# Altium PCB EMG sensors(1).PcbDoc
Units mm, origin at the board's own origin, x right, y up, seen from the top; angles counter-clockwise.
Board outline 152.4 x 101.6 mm, 20 copper layers (F.Cu, F.Mask, B.Cu, B.Mask, In1.Cu, F.SilkS, In2.Cu, B.SilkS, F.Adhes, B.Adhes, F.Paste, B.Paste, Dwgs.User, Cmts.User, Eco1.User, Eco2.User, Edge.Cuts, Margin, B.CrtYd, F.CrtYd); 30 components, 18 nets, 82 pads, 27 vias.
Unrouted connection lines stored in the file: 19.
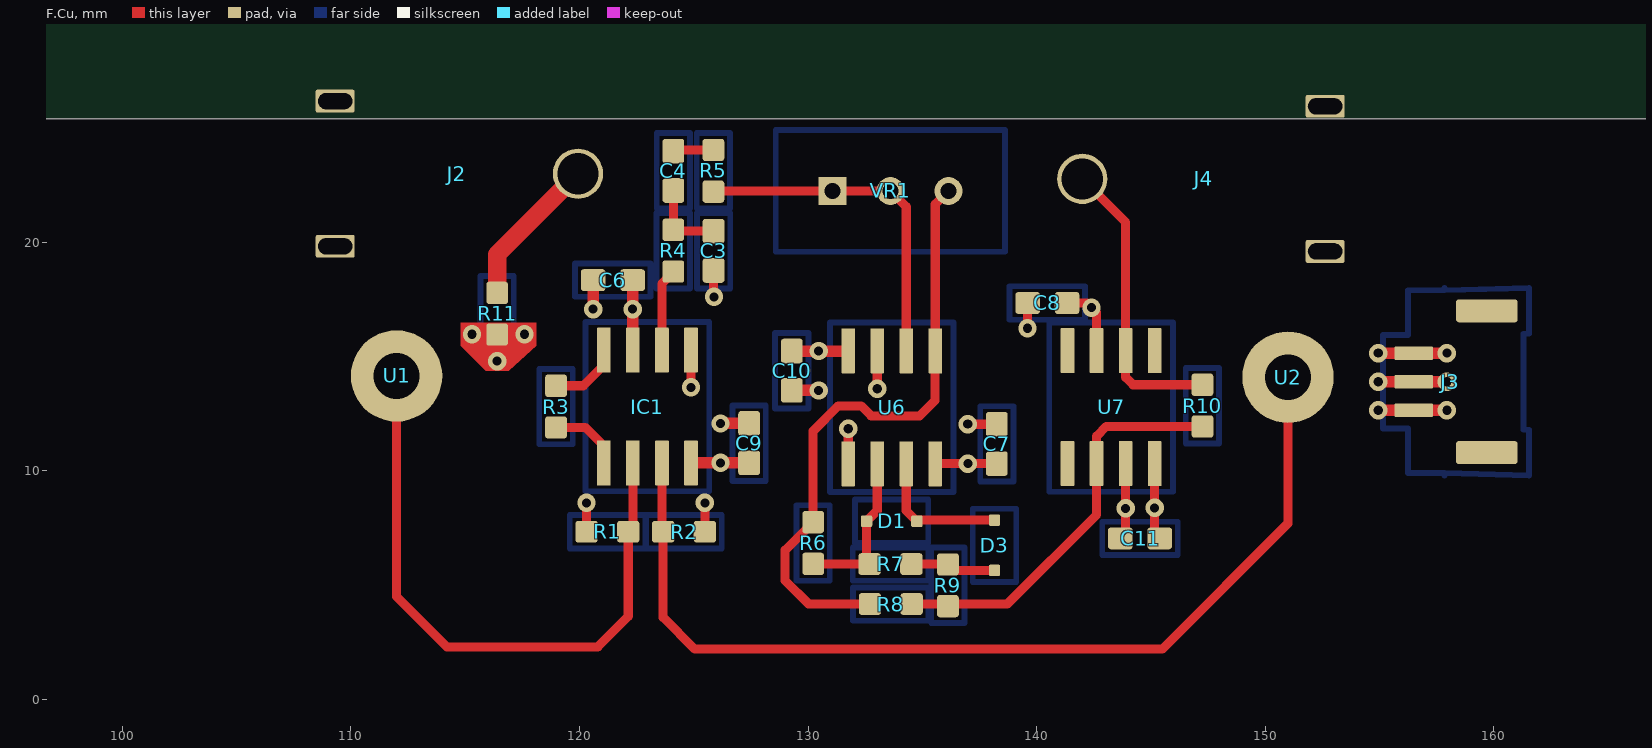
[diagram p0: F.Cu view]
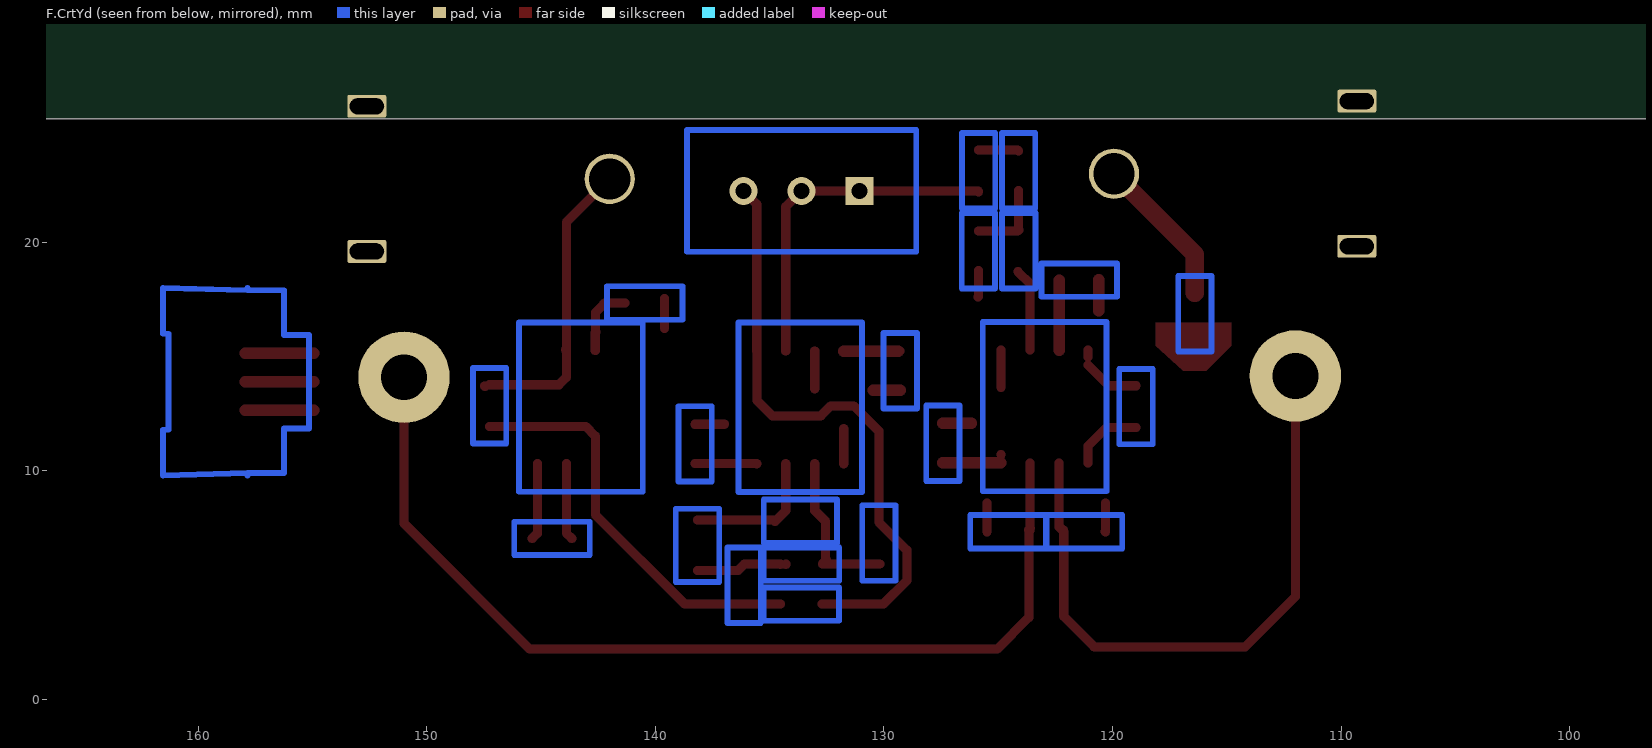
[diagram p1: F.CrtYd view, seen from below]
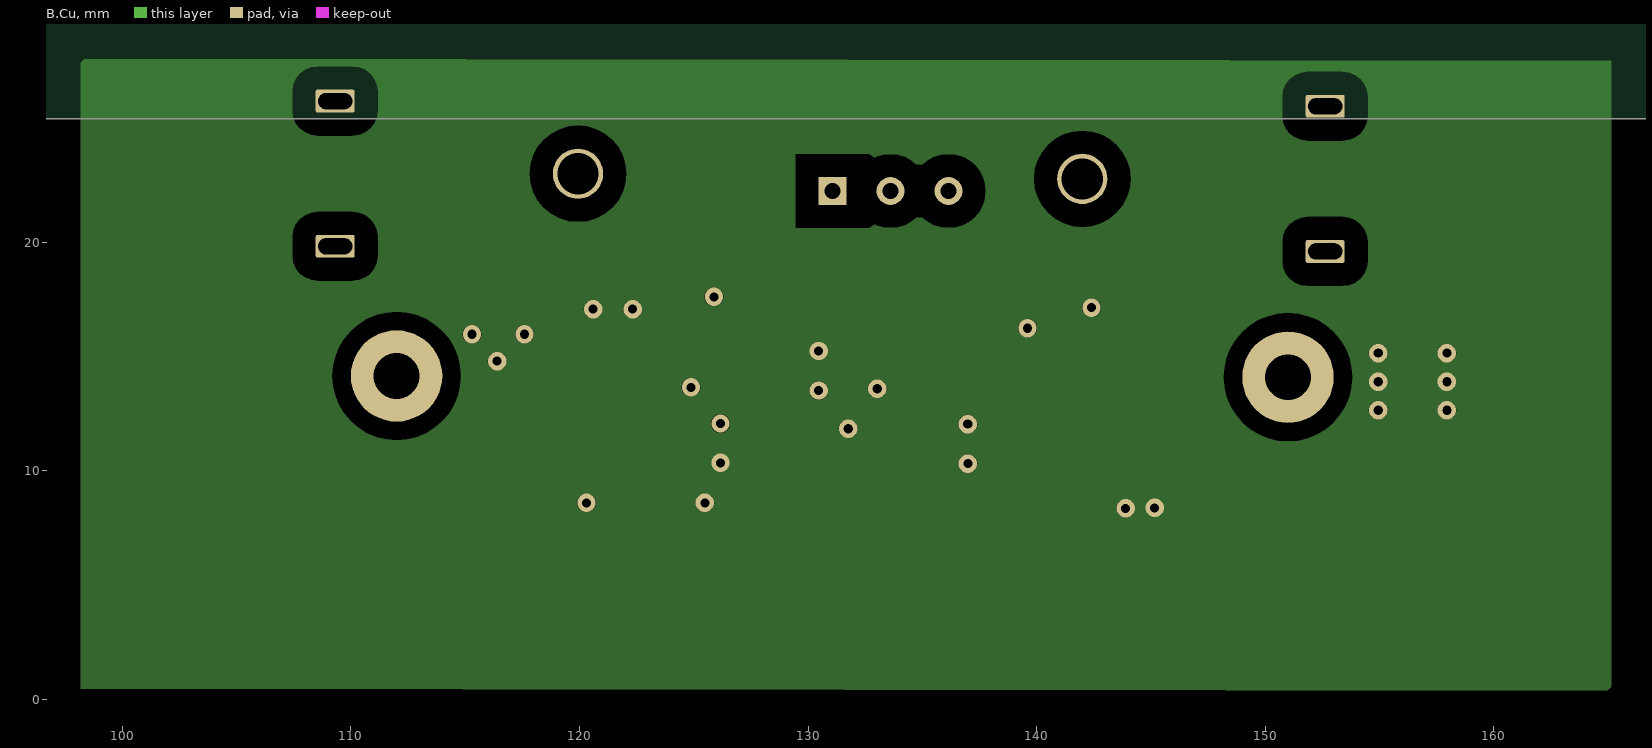
[diagram p2: B.Cu]
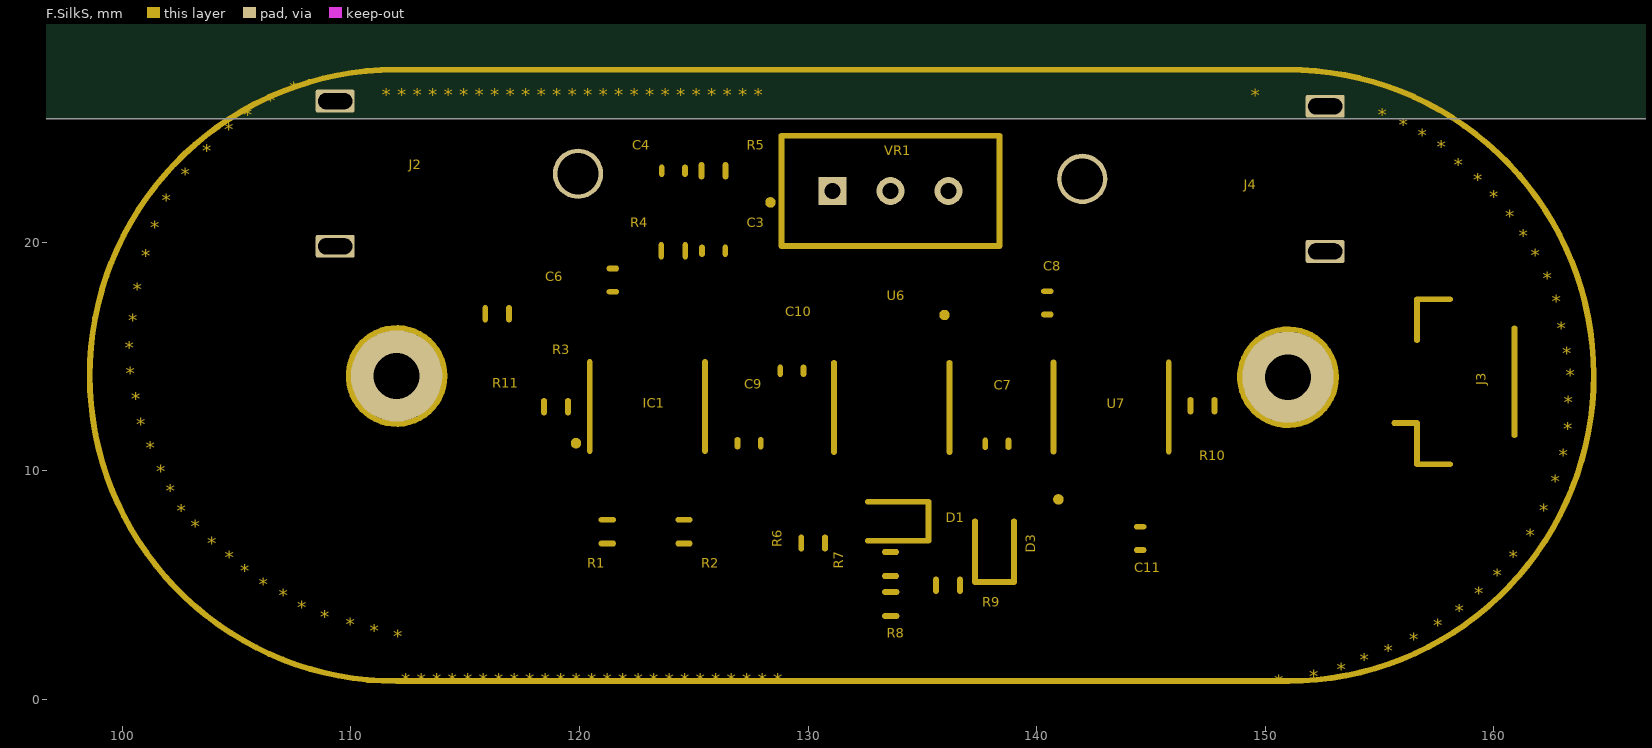
[diagram p3: F.SilkS]
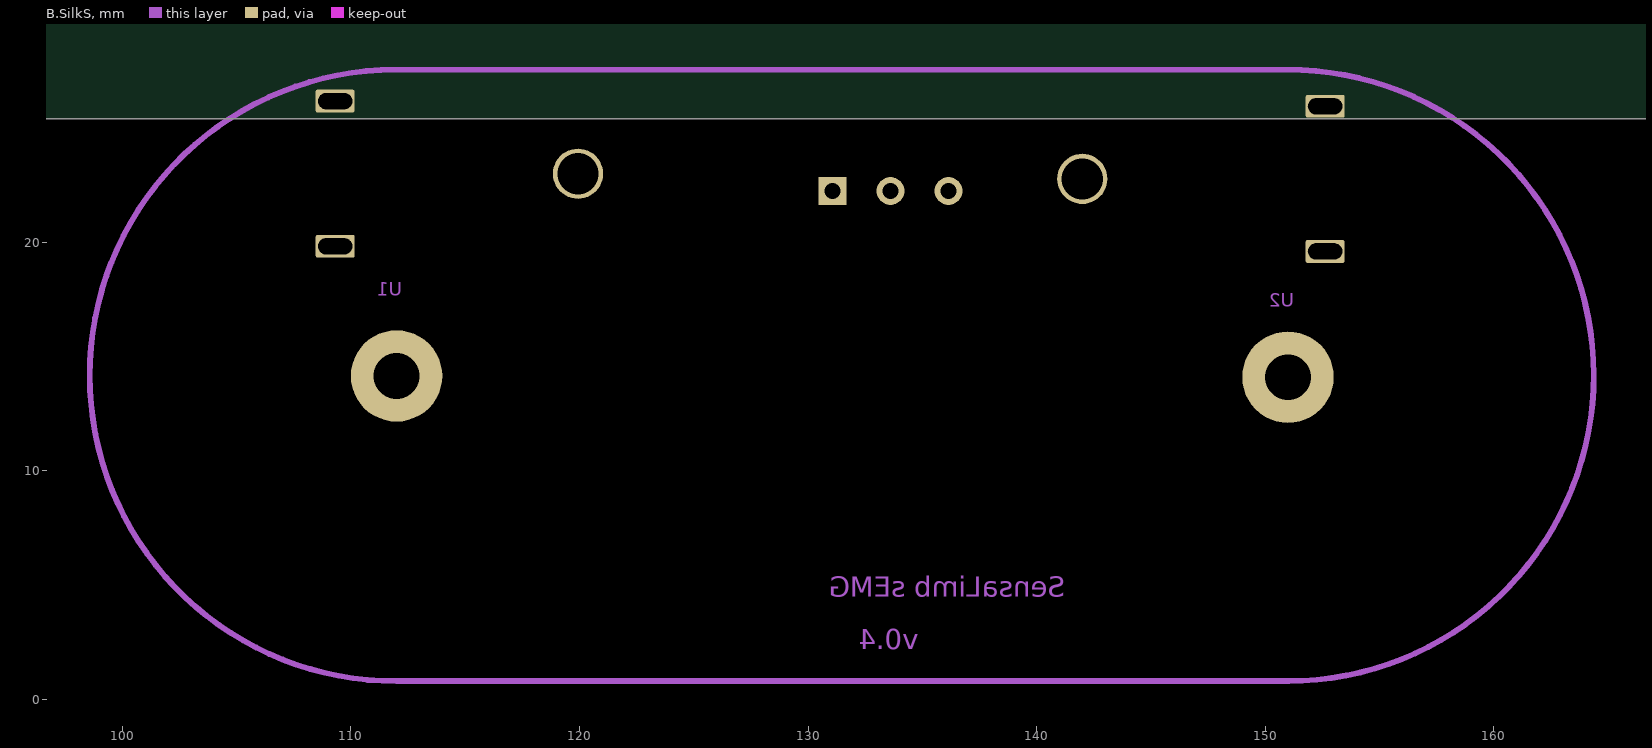
[diagram p4: B.SilkS]
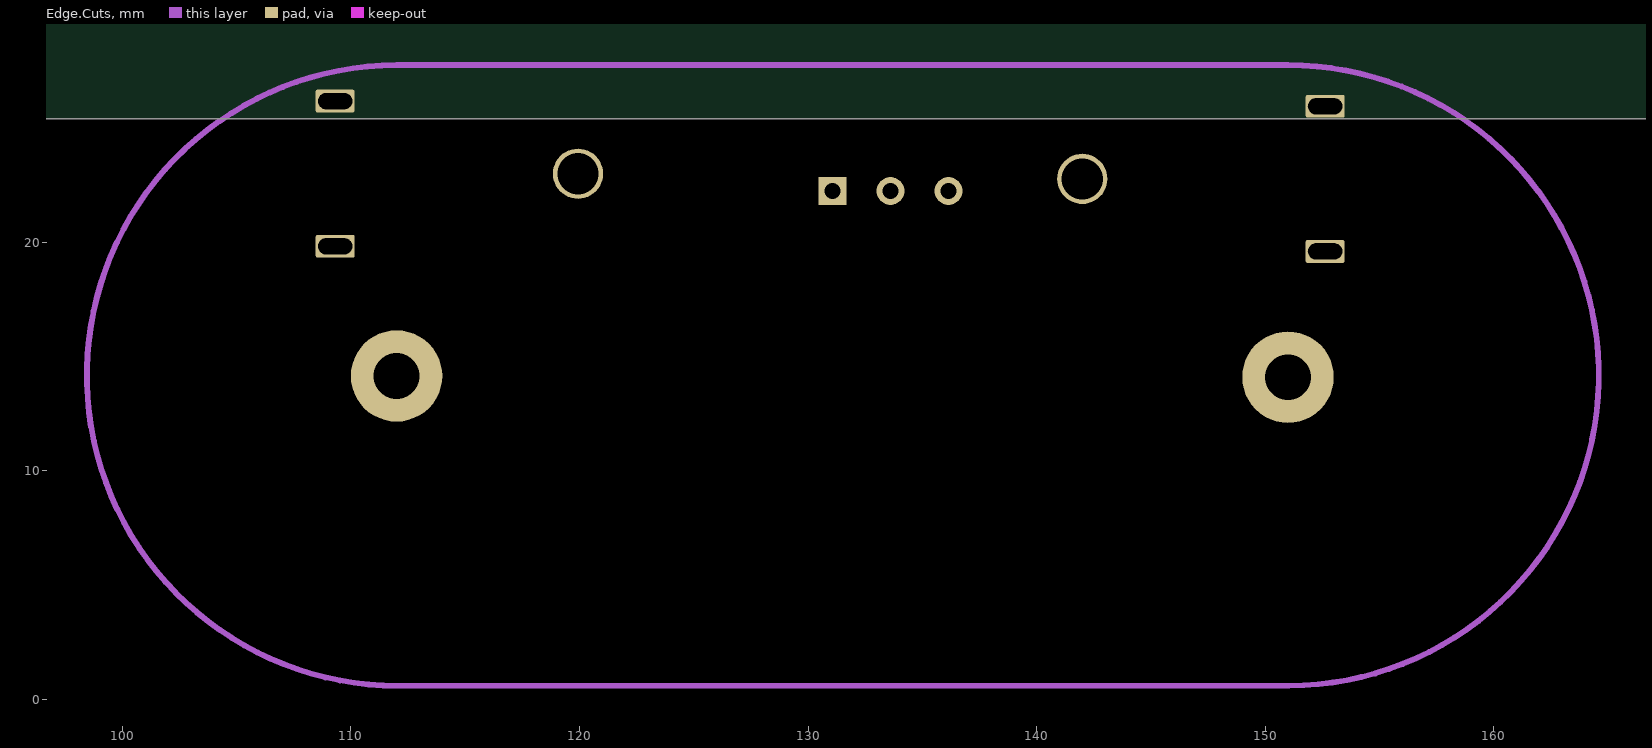
[diagram p5: Edge.Cuts]
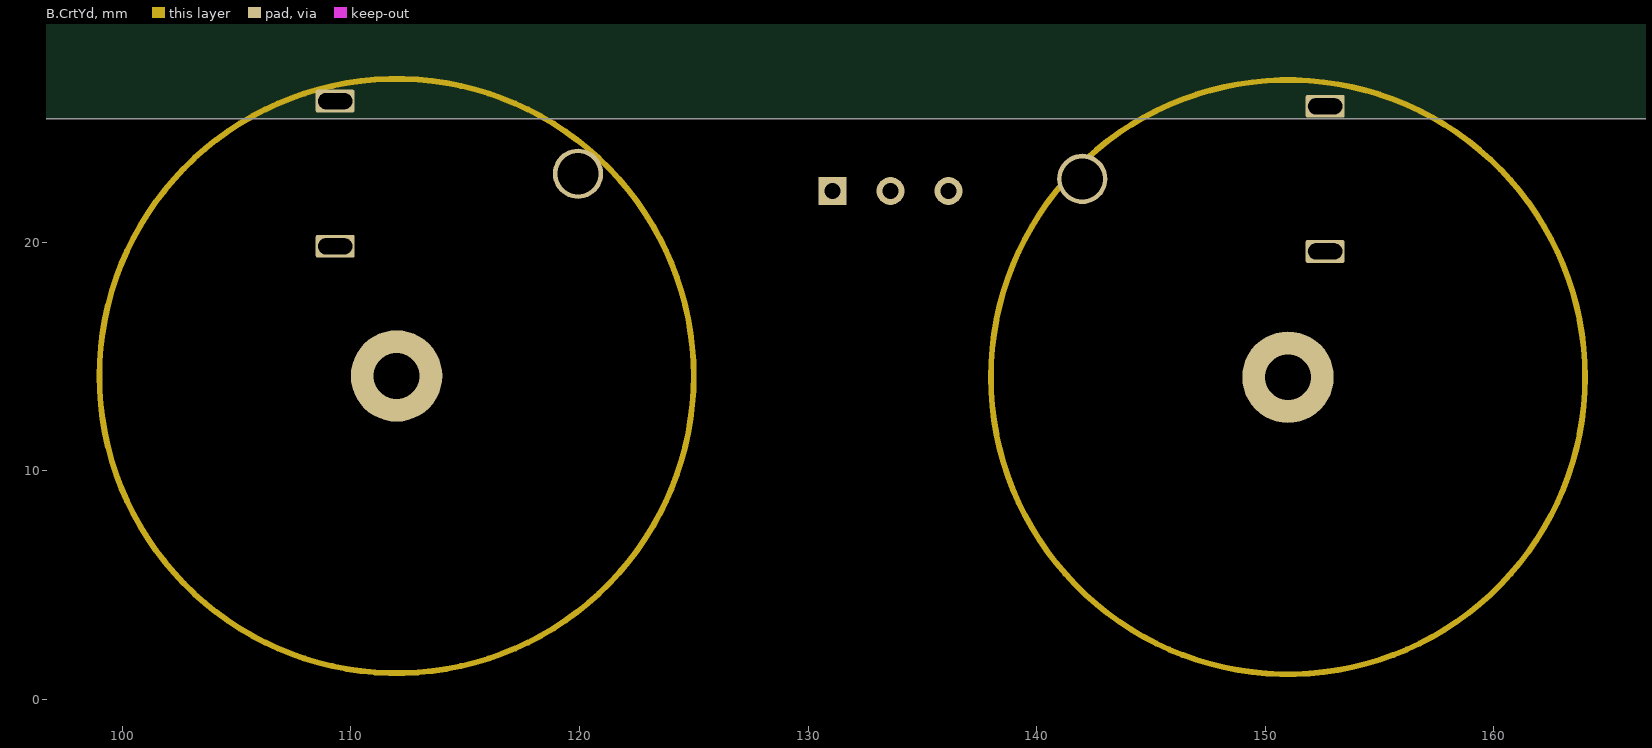
[diagram p6: B.CrtYd]

## Layer stack, top to bottom
Top Solder: solder mask 0.0102, Solder Resist, Dk 3.5
F.Cu: signal copper 0.0356
Dielectric 1: dielectric 0.32, FR-4, Dk 4.8
F.Mask: signal copper 0.0356
Dielectric2: dielectric 0.32, FR-4, Dk 4.8
B.Cu: signal copper 0.0356
Dielectric3: dielectric 0.32, FR-4, Dk 4.8
B.Mask: signal copper 0.0356
Dielectric4: dielectric 0.32, FR-4, Dk 4.8
In1.Cu: signal copper 0.0356
Dielectric5: dielectric 0.32, FR-4, Dk 4.8
F.SilkS: signal copper 0.0356
Dielectric6: dielectric 0.32, FR-4, Dk 4.8
In2.Cu: signal copper 0.0356
Dielectric7: dielectric 0.32, FR-4, Dk 4.8
B.SilkS: signal copper 0.0356
Dielectric8: dielectric 0.32, FR-4, Dk 4.8
F.Adhes: signal copper 0.0356
Dielectric9: dielectric 0.32, FR-4, Dk 4.8
B.Adhes: signal copper 0.0356
Dielectric10: dielectric 0.32, FR-4, Dk 4.8
F.Paste: signal copper 0.0356
Dielectric11: dielectric 0.32, FR-4, Dk 4.8
B.Paste: signal copper 0.0356
Dielectric12: dielectric 0.32, FR-4, Dk 4.8
Dwgs.User: signal copper 0.0356
Dielectric13: dielectric 0.32, FR-4, Dk 4.8
Cmts.User: signal copper 0.0356
Dielectric14: dielectric 0.32, FR-4, Dk 4.8
Eco1.User: signal copper 0.0356
Dielectric15: dielectric 0.32, FR-4, Dk 4.8
Eco2.User: signal copper 0.0356
Dielectric16: dielectric 0.32, FR-4, Dk 4.8
Edge.Cuts: signal copper 0.0356
Dielectric17: dielectric 0.32, FR-4, Dk 4.8
Margin: signal copper 0.0356
Dielectric18: dielectric 0.32, FR-4, Dk 4.8
B.CrtYd: signal copper 0.0356
Dielectric19: dielectric 0.32, FR-4, Dk 4.8
F.CrtYd: signal copper 0.0356
Bottom Solder: solder mask 0.0102, Solder Resist, Dk 3.5

## Board outline
25.4,25.4 177.8,25.4 177.8,127 25.4,127

## Design rules (kind name [scope] priority, off if disabled: settings)
Clearance "Clearence 1_PadClass" [InPadClass('Pad Class Clearance 1')] p1: gap=1 ignorepadtopadclearanceinfootprint=FALSE
Clearance "Clearence 0.8_PadClass" [InPadClass('Pad Class Clearance 0.8')] p2: gap=0.8 ignorepadtopadclearanceinfootprint=FALSE
MinimumSolderMaskSliver [All] p1: minsoldermaskwidth=0
PolygonConnect Polygon_In2.Cu-/+5.5V_ConnectDirect [IsNamedPolygon('In2.Cu-/+5.5V') vs IsVia] p1: connectstyle=Direct reliefconductorwidth=0.254 reliefentries=4 polygonreliefangle="90 Angle" airgapwidth=0.254
PolygonConnect Polygon_In2.Cu-/+5.5V_ConnectRelief45 [IsNamedPolygon('In2.Cu-/+5.5V') vs (IsThruPin or IsSMTPin) and (PadShape_AllLayers = 'Round')] p2: connectstyle=Relief reliefconductorwidth=0.5 reliefentries=4 polygonreliefangle="45 Angle" airgapwidth=0.5
PolygonConnect Polygon_In2.Cu-/+5.5V_ConnectRelief90 [IsNamedPolygon('In2.Cu-/+5.5V') vs (IsThruPin or IsSMTPin) and (PadShape_AllLayers <> 'Round')] p3: connectstyle=Relief reliefconductorwidth=0.5 reliefentries=4 polygonreliefangle="90 Angle" airgapwidth=0.5
PolygonConnect Polygon_In1.Cu-GND_ConnectDirect [IsNamedPolygon('In1.Cu-GND') vs IsVia] p4: connectstyle=Direct reliefconductorwidth=0.254 reliefentries=4 polygonreliefangle="90 Angle" airgapwidth=0.254
PolygonConnect Polygon_In1.Cu-GND_ConnectRelief45 [IsNamedPolygon('In1.Cu-GND') vs (IsThruPin or IsSMTPin) and (PadShape_AllLayers = 'Round')] p5: connectstyle=Relief reliefconductorwidth=0.5 reliefentries=4 polygonreliefangle="45 Angle" airgapwidth=0.5
PolygonConnect Polygon_In1.Cu-GND_ConnectRelief90 [IsNamedPolygon('In1.Cu-GND') vs (IsThruPin or IsSMTPin) and (PadShape_AllLayers <> 'Round')] p6: connectstyle=Relief reliefconductorwidth=0.5 reliefentries=4 polygonreliefangle="90 Angle" airgapwidth=0.5
PolygonConnect Polygon_B.Cu-/-5.5V_ConnectDirect [IsNamedPolygon('B.Cu-/-5.5V') vs IsVia] p7: connectstyle=Direct reliefconductorwidth=0.254 reliefentries=4 polygonreliefangle="90 Angle" airgapwidth=0.254
PolygonConnect Polygon_B.Cu-/-5.5V_ConnectRelief45 [IsNamedPolygon('B.Cu-/-5.5V') vs (IsThruPin or IsSMTPin) and (PadShape_AllLayers = 'Round')] p8: connectstyle=Relief reliefconductorwidth=0.5 reliefentries=4 polygonreliefangle="45 Angle" airgapwidth=0.5
PolygonConnect Polygon_B.Cu-/-5.5V_ConnectRelief90 [IsNamedPolygon('B.Cu-/-5.5V') vs (IsThruPin or IsSMTPin) and (PadShape_AllLayers <> 'Round')] p9: connectstyle=Relief reliefconductorwidth=0.5 reliefentries=4 polygonreliefangle="90 Angle" airgapwidth=0.5
RoutingVias [All] p1: holewidth=0.711 width=1.27 viastyle="Through Hole" minholewidth=0.711 minwidth=1.27 maxholewidth=0.711 maxwidth=1.27
SilkToSilkClearance [All] p1: silktosilkclearance=0
SilkToSolderMaskClearance [IsPad] p1: minsilkscreentomaskgap=0 clearancetoexposedcopper=TRUE
SolderMaskExpansion [All] p1: expansion=0.102 istentingtop=FALSE
Width [All] p1: maxlimit=10 minlimit=0.254 preferedwidth=0.254 midlayer1_maxwidth=0.254 midlayer3_maxwidth=0.254 midlayer9_maxwidth=0.254 midlayer11_maxwidth=0.254 midlayer13_maxwidth=0.254 midlayer15_maxwidth=0.254 midlayer17_maxwidth=0.254 midlayer19_maxwidth=0.254 midlayer21_maxwidth=0.254 midlayer23_maxwidth=0.254 midlayer27_maxwidth=0.254 minimp=50.000000 maximp=50.000000 favimp=50.000000
27 further rules are at their usual default settings.

## Classes and differential pairs
pad class "Pad Class Clearance 0.8": U1-1 U2-1
pad class "Pad Class Clearance 1": J2-1 J2-3 J4-1 J4-3 VR1-1 VR1-2 VR1-3

## Components (designator, comment, footprint, x,y, rotation, side; value= is the part's Value field where it differs from the comment)
C3 "Comment" C_0603_1608Metric_Pad1.08x0.95mm_HandSolder 125.868,19.618 r270 top value=8.2nF
C4 "Comment" C_0603_1608Metric_Pad1.08x0.95mm_HandSolder 124.109,23.117 r270 top value=1uF
C6 "Comment" C_0603_1608Metric_Pad1.08x0.95mm_HandSolder 121.463,18.334 r180 top value=1uF
C7 "Comment" C_0603_1608Metric_Pad1.08x0.95mm_HandSolder 138.262,11.168 r90 top value=1uF
C8 "Comment" C_0603_1608Metric_Pad1.08x0.95mm_HandSolder 140.47,17.333 r180 top value=1uF
C9 "Comment" C_0603_1608Metric_Pad1.08x0.95mm_HandSolder 127.423,11.202 r90 top value=1uF
C10 "Comment" C_0603_1608Metric_Pad1.08x0.95mm_HandSolder 129.293,14.37 r270 top value=1uF
C11 "Comment" C_0603_1608Metric_Pad1.08x0.95mm_HandSolder 144.526,7.033 r180 top value=1uF
D1 "Comment" D_SOD-323F 133.661,7.784 r180 top value=BAT54J
D3 "Comment" D_SOD-323F 138.159,6.733 r90 top value=BAT54J
IC1 "Comment" INA128U 122.973,12.802 r90 top value=INA128
J2 "Comment" DIN_Male_1PIN_1.5mm#1 112.687,23.289 r0 top value=Conn_01x01_Pin
J3 "Comment" JST_GH_SM03B-GHS-TB_1x03-1MP_P1.25mm_Horizontal 158.35,13.889 r90 top value=Conn_01x03_Pin
J4 "Comment" DIN_Male_1PIN_1.5mm#2 149.225,22.414 r180 top value=Conn_01x01_Pin
R1 "Comment" R_0603_1608Metric_Pad0.98x0.95mm_HandSolder 121.226,7.327 r0 top value=10M
R2 "Comment" R_0603_1608Metric_Pad0.98x0.95mm_HandSolder 124.576,7.327 r0 top value=10M
R3 "Comment" R_0603_1608Metric_Pad0.98x0.95mm_HandSolder 118.976,12.802 r270 top value=200
R4 "Comment" R_0603_1608Metric_Pad0.98x0.95mm_HandSolder 124.106,19.62 r90 top value=10k
R5 "Comment" R_0603_1608Metric_Pad0.98x0.95mm_HandSolder 125.862,23.118 r90 top value=10k
R6 "Comment" R_0603_1608Metric_Pad0.98x0.95mm_HandSolder 130.226,6.833 r270 top value=20k
R7 "Comment" R_0603_1608Metric_Pad0.98x0.95mm_HandSolder 133.609,5.912 r180 top value=20k
R8 "Comment" R_0603_1608Metric_Pad0.98x0.95mm_HandSolder 133.622,4.162 r180 top value=20k
R9 "Comment" R_0603_1608Metric_Pad0.98x0.95mm_HandSolder 136.122,4.983 r270 top value=10k
R10 "Comment" R_0603_1608Metric_Pad0.98x0.95mm_HandSolder 147.256,12.842 r90 top value=20k
R11 "Comment" R_0603_1608Metric_Pad0.98x0.95mm_HandSolder 116.4,16.864 r90 top value=1M
U1 "Comment" EMG_Snap_4mm 112,14.139 r90 top value=~
U2 "Comment" EMG_Snap_4mm 151,14.089 r90 top value=~
U6 "Comment" ОПА2188AIDR 133.665,12.768 r270 top value=OPA2188AIDR
U7 "Comment" OPA188 143.261,12.779 r90 top value=OPA188AIDR
VR1 "Comment" TRIM_3296W-1-104ALF 133.608,22.233 r0 top value=100k

## Footprints (in the part's own frame and the unit in brackets; to place one, negate y for a bottom-side part, rotate by r counter-clockwise, add the part's x,y. Pads: shape width x height; smd on the part's side, far side on the other; paste and mask are expansions set on the pad)
C_0603_1608Metric_Pad1.08x0.95mm_HandSolder [mm]
  rrect25% 1.075x0.95 smd paste-1.075 mask-1.075: 1(-0.863,0) 2(0.863,0)
  F.SilkS lines w0.254: 0.146,-0.51 -0.146,-0.51 ; 0.146,0.51 -0.146,0.51
  F.CrtYd lines w0.254: 1.65,-0.73 1.65,0.73 -1.65,0.73 -1.65,-0.73 1.65,-0.73
D_SOD-323F [mm]
  rrect25% 0.5x0.5 smd paste-0.5 mask-0.5: 1(-1.1,0) 2(1.1,0)
  F.SilkS lines w0.254: 1.05,0.85 -1.61,0.85 -1.61,-0.85 1.05,-0.85
  F.CrtYd lines w0.254: 1.6,0.95 1.6,-0.95 -1.6,-0.95 -1.6,0.95 1.6,0.95
DIN_Male_1PIN_1.5mm#1 [mm]
  round 2.2 hole 1.8 paste-2539.97 mask-2.2: 1(7.25,-0.3)
  rrect15% 1.7x1 hole 0.7 slot 1.5 at 0 deg paste-2539.97 mask-1.7: 3(-3.375,-3.475) 3(-3.375,2.875)
DIN_Male_1PIN_1.5mm#2 [mm]
  round 2.2 hole 1.8 paste-2539.97 mask-2.2: 1(7.225,-0.35)
  rrect15% 1.7x1 hole 0.7 slot 1.5 at 0 deg paste-2539.97 mask-1.7: 3(-3.4,2.825) 3(-3.4,-3.525)
EMG_Snap_4mm [mm]
  round 4 hole 2 paste-2539.97 mask-4: 1(0,0)
  B.CrtYd circle w0.254: c0,0 r13
INA128U [mm]
  rrect12% 1.97x0.6 smd paste-1.97 mask-1.97: 1(-2.47,1.905) 2(-2.47,0.635) 3(-2.47,-0.635) 4(-2.47,-1.905) 5(2.47,-1.905) 6(2.47,-0.635) 7(2.47,0.635) 8(2.47,1.905)
  F.SilkS circle w0.254: c-1.6,3.125 r0.1
  F.SilkS lines w0.254: -1.95,2.525 1.95,2.525 ; -1.95,-2.525 1.95,-2.525
  F.CrtYd lines w0.254: -3.705,2.702 3.705,2.702 3.705,-2.702 -3.705,-2.702 -3.705,2.702
JST_GH_SM03B-GHS-TB_1x03-1MP_P1.25mm_Horizontal [mm]
  rrect25% 0.6x1.7 smd paste-1.7 mask-1.7: 1(-1.25,1.85) 2(0,1.85) 3(1.25,1.85)
  rrect25% 1x2.7 smd paste-2.7 mask-2.7: MP(-3.1,-1.35) MP(3.1,-1.35)
  F.SilkS lines w0.254: -1.81,2.7 -1.81,1.71 -3.61,1.71 -3.61,0.26 ; 1.81,1.71 3.61,1.71 3.61,0.26 ; -2.34,-2.56 2.34,-2.56
  F.CrtYd lines w0.254: -4.1,0.5 -4,0.5 ; 4.1,0.5 4,0.5 ; -4,0.5 -4.1,-3.2 -2.1,-3.2 -2.1,-2.95 2.1,-2.95 2.1,-3.2 4.1,-3.2 4,0.5 ; -4,0.5 -4,2.1 -2.05,2.1 -2.05,3.2 2.05,3.2 2.05,2.1 4,2.1 4,0.5
OPA188 [mm]
  rrect12% 1.97x0.6 smd paste-1.97 mask-1.97: 1(-2.47,1.905) 2(-2.47,0.635) 3(-2.47,-0.635) 4(-2.47,-1.905) 5(2.47,-1.905) 6(2.47,-0.635) 7(2.47,0.635) 8(2.47,1.905)
  F.SilkS circle w0.254: c-4.04,2.305 r0.1
  F.SilkS lines w0.254: -1.95,2.525 1.95,2.525 ; -1.95,-2.525 1.95,-2.525
  F.CrtYd lines w0.254: -3.705,2.702 3.705,2.702 3.705,-2.702 -3.705,-2.702 -3.705,2.702
R_0603_1608Metric_Pad0.98x0.95mm_HandSolder [mm]
  rrect25% 0.975x0.95 smd paste-0.975 mask-0.975: 1(-0.913,0) 2(0.913,0)
  F.SilkS lines w0.254: -0.255,-0.523 0.255,-0.523 ; -0.255,0.523 0.255,0.523
  F.CrtYd lines w0.254: -1.65,-0.73 1.65,-0.73 1.65,0.73 -1.65,0.73 -1.65,-0.73
TRIM_3296W-1-104ALF [mm]
  rect 1.218x1.218 hole 0.71 paste-2539.97 mask-1.218: 1(-2.54,0)
  round 1.218 hole 0.71 paste-2539.97 mask-1.218: 2(0,0) 3(2.54,0)
  F.SilkS circle w0.254: c-5.25,-0.5 r0.1
  F.SilkS lines w0.254: -4.765,-2.41 4.765,-2.41 4.765,2.42 -4.765,2.42 -4.765,-2.41
  F.CrtYd lines w0.254: -5.015,-2.66 5.015,-2.66 5.015,2.67 -5.015,2.67 -5.015,-2.66
ОПА2188AIDR [mm]
  rrect12% 1.97x0.6 smd paste-1.97 mask-1.97: 1(-2.47,1.905) 2(-2.47,0.635) 3(-2.47,-0.635) 4(-2.47,-1.905) 5(2.47,-1.905) 6(2.47,-0.635) 7(2.47,0.635) 8(2.47,1.905)
  F.SilkS circle w0.254: c-4.04,2.305 r0.1
  F.SilkS lines w0.254: 1.95,-2.525 -1.95,-2.525 ; 1.95,2.525 -1.95,2.525
  F.CrtYd lines w0.254: 3.705,-2.702 3.705,2.702 -3.705,2.702 -3.705,-2.702 3.705,-2.702

## Part data
C3 C4 C6 C7 C8 C9 C10 C11: library part C_0603_1608Metric_Pad1.08x0.95mm_HandSolder, "Capacitor SMD 0603 (1608 Metric), square (rectangular) end terminal, IPC-7351 nominal with elongated pad for handsoldering. (Body size source: IPC-SM-782 page 76, https://www.pcb-3d.com/wordpress/wp-content/uploads/ipc-sm-782a_amendment_1_and_2.pdf), generated with kicad-footprint-generator", Datasheet=~, Description="Unpolarized capacitor", ki_fp_filters=C_*
  C3: Website=https://eu.mouser.com/ProductDetail/KEMET/C0603X822F5JACTU?qs=rKqJIm0tnYHyDiSLXoAHvg%3D%3D
  C4 C6 C7 C8 C9 C10 C11: Website=https://www.digikey.in/en/products/detail/kyocera-avx/KGM15BR71H104JT/1600043
D1 D3: library part D_SOD-323F, "SOD-323F http://www.nxp.com/documents/outline_drawing/SOD323F.pdf", Datasheet=https://assets.nexperia.com/documents/data-sheet/BAT54J.pdf, Description="30V 200mA Schottky diode, SOD-323F", ki_fp_filters=D*SOD?323F*
IC1: library part INA128U, Package="DIP-8 Rochester Electronics, LLC", MF="Texas Instruments", Description_1="\n                        \n                            Instrumentation Amplifier 1 Circuit - 8-PDIP\n                        \n", MPN=INA128U, Price=None, OC_FARNELL=1212413, SnapEDA_Link=https://www.snapeda.com/parts/INA128/Texas+Instruments/view-part/?ref=snap, MP=INA128, OC_NEWARK=35C1729, Availability="Not in stock", Check_prices=https://www.snapeda.com/parts/INA128/Texas+Instruments/view-part/?ref=eda
J2 J4: library part DIN_Male_1PIN_1.5mm, Datasheet=~, Description="Generic connector, single row, 01x01, script generated", ki_fp_filters=Connector*:*_1x??_*
J3: library part JST_GH_SM03B-GHS-TB_1x03-1MP_P1.25mm_Horizontal, "JST GH series connector, SM03B-GHS-TB (http://www.jst-mfg.com/product/pdf/eng/eGH.pdf), generated with kicad-footprint-generator", Datasheet=~, Description="Generic connector, single row, 01x03, script generated", ki_fp_filters=Connector*:*_1x??_*
R1 R2 R3 R4 R5 R6 R7 R8 R9 R10 R11: library part R_0603_1608Metric_Pad0.98x0.95mm_HandSolder, "Resistor SMD 0603 (1608 Metric), square (rectangular) end terminal, IPC-7351 nominal with elongated pad for handsoldering. (Body size source: IPC-SM-782 page 72, https://www.pcb-3d.com/wordpress/wp-content/uploads/ipc-sm-782a_amendment_1_and_2.pdf), generated with kicad-footprint-generator", Datasheet=~, Description=Resistor, ki_fp_filters=R_*
  R1 R2 R3: Website=https://eu.mouser.com/ProductDetail/TE-Connectivity-Holsworthy/RT73F1J200RBTD?qs=sGAEpiMZZMvdGkrng054txLI%2FDB4oIKDBdRkx0ZmGeiYIoSkg5JMIw%3D%3D
U1 U2: library part EMG_Snap_4mm
U6: library part ОПА2188AIDR, Package="SOIC-8 Texas Instruments", MF="Texas Instruments", Description_1="\n                        \n                            0.03µV/°C, 6µV Vos, Low Noise, Rail-to-Rail Output, 36V Zero-Drift Operational Amplifier\n                        \n", Price=None, SnapEDA_Link=https://www.snapeda.com/parts/OPA2188AIDR/Texas+Instruments/view-part/?ref=snap, MP=OPA2188AIDR, Availability="In Stock", Check_prices=https://www.snapeda.com/parts/OPA2188AIDR/Texas+Instruments/view-part/?ref=eda
U7: library part OPA188, Package="SOIC-8 Texas Instruments", MF="Texas Instruments", Description_1="\n                        \n                            Precision, Low-Noise, Rail-to-Rail Output, 36V Zero-Drift Operational Amplifier\n                        \n", Price=None, SnapEDA_Link=https://www.snapeda.com/parts/OPA188AIDR/Texas+Instruments/view-part/?ref=snap, MP=OPA188AIDR, Availability="In Stock", Check_prices=https://www.snapeda.com/parts/OPA188AIDR/Texas+Instruments/view-part/?ref=eda
VR1: library part TRIM_3296W-1-104ALF, Package="NON STANDARD-3 Bourns", MANUFACTURER=Bourns, MF=Bourns, Description_1="\n                        \n                            TRIMMER - 3/8in SQ MT CERMET | Bourns 3296W-1-104ALF\n                        \n", Price=None, Check_prices=https://www.snapeda.com/parts/3296W-1-104ALF/Bourns/view-part/?ref=eda, STANDARD="Manufacturer Recommendation", PARTREV=05/16, SnapEDA_Link=https://www.snapeda.com/parts/3296W-1-104ALF/Bourns/view-part/?ref=snap, MP=3296W-1-104ALF, Availability="In Stock"

## Via types
v1: diameter 0.8, hole 0.4, F.Cu to B.Cu, tented both sides, 27 vias

## Nets (pads, with @x,y where several pads share a name; then routed paths per layer and width w, separated by ;. In a path a pad name is that pad's centre, name@x,y a point inside that pad or via, vN(x,y) a via of type N, cw(c..) or ccw(c..) an arc to the next point about the centre after c; other vN are vias at no path point)
+5.5V: C6.1 C7.1 C8.1 IC1.7 J3.1 U6.8 U7.7 | length 12.7
  F.Cu w0.4: U6.8 135.577,10.305 C7.1 ; C8.1 142.205,17.333 v1(142.408,17.13) 142.626,16.912 U7.7 142.636,15.259 142.636,16.03 U7.7@142.608,16.058
  F.Cu w0.5: C6.1 122.327,18.332 IC1.7@122.327,15.265 ; v1(154.95,12.639) v1(157.95,12.639)
  other v1: 136.992,10.304 122.327,17.064
-5.5V: C9.1 C10.1 C11.1 IC1.4 J3.2 U6.4 U7.4 | length 11.4
  F.Cu w0.4: IC1.4@124.878,10.693 IC1.4@124.886,10.701 ; C10.1 129.37,15.233 C10.1@129.372,15.231 ; U6.4@131.753,15.231 U6.4 ; U7.4 v1(145.166,8.369) 145.166,7.255 C11.1
  F.Cu w0.5: IC1.4@124.886,10.339 v1(126.173,10.339) C9.1 ; C10.1@129.372,15.231 v1(130.465,15.231) U6.4@131.753,15.231 ; v1(154.95,13.889) v1(157.95,13.889)
AEMG: J4.1 R10.2 U7.6 | length 13
  F.Cu w0.4: J4.1 143.896,20.868 U7.6 ; U7.6@143.933,15.286 U7.6 ; R10.2 144.226,13.754 143.896,14.085 U7.6 ; R10.2@147.461,13.687 R10.2@147.48,13.706
GND: C3.2 C6.2 C7.2 C8.2 C9.2 C10.2 C11.2 IC1.5 J3.3 R1.1 R2.2 R11.1 U6.3 U6.5 U7.3 | length 21.3
  F.Cu w0.4: v1(120.313,8.589) R1.1 R1.1@120.326,7.339 ; v1@124.878,13.644 IC1.5 ; R2.2 v1(125.488,8.589) ; C3.2 125.868,17.618 v1(125.884,17.603) ; v1@130.461,13.508 v1(130.465,13.504) ; U6.5 v1(131.76,11.833) ; v1(133.03,13.581) U6.3 ; v1(136.987,12.032) 136.988,12.03 C7.2 ; v1(139.608,16.23) C8.2@139.608,17.53 ; C11.2 143.896,7.265 143.896,7.533 v1(143.896,8.349) U7.3
  F.Cu w0.5: v1@120.6,16.989 C6.2@120.6,18.345 ; v1(126.173,12.064) C9.2 ; C10.2 v1@130.461,13.508 ; v1(154.95,15.139) v1(157.95,15.139)
  other v1: 124.878,13.643 116.4,14.789 115.3,15.964 117.6,15.964 120.6,17.064
INVERTED: R6.1 R8.2 U6.1 VR1.3 | length 26.8
  F.Cu w0.4: R8.2 130.027,4.162 129,5.189 129,6.52 R6.1 130.226,11.733 131.326,12.833 132.326,12.833 132.766,12.392 134.885,12.392 135.563,13.07 U6.1@135.563,15.231 ; U6.1 135.57,21.655 VR1.3
Net-(C3-Pad1): C3.1 C4.2 R4.2 | length 3.5
  F.Cu w0.4: R4.2 124.158,20.481 C3.1 ; C4.2 124.109,20.563 R4.2@124.141,20.531
Net-(C4-Pad1): C4.1 R5.2 | length 1.8
  F.Cu w0.4: C4.1 124.16,24.031 R5.2
Net-(D1-A): D1.2 R6.2 R7.2 U6.6 | length 7.5
  F.Cu w0.4: R6.2@130.188,5.912 130.196,5.92 132.689,5.92 R7.2 ; R7.2@132.459,5.912 R7.2@132.524,5.977 ; R7.2@132.524,6.085 R7.2 ; U6.6 133.03,8.253 D1.2 132.561,6.048 R7.2
Net-(D1-K): D1.1 D3.2 U6.7 | length 6.1
  F.Cu w0.4: U6.7 134.3,8.253 134.296,8.249 D1.1 134.81,7.833 D3.2
Net-(D3-K): D3.1 R7.1 R9.1 | length 3.8
  F.Cu w0.4: R7.1@134.284,5.912 R7.1@134.301,5.896 ; R7.1@134.538,5.896 R7.1 136.106,5.912 R9.1 136.385,5.633 D3.1
Net-(IC1-Pad1): IC1.1 R3.2 | length 3.2
  F.Cu w0.4: R3.2 120.258,11.889 121.068,11.079 IC1.1
Net-(IC1-Pad6): IC1.6 R4.1 | length 3.7
  F.Cu w0.4: IC1.6 123.608,18.173 R4.1@124.141,18.706
Net-(IC1-Pad8): IC1.8 R3.1 | length 2.8
  F.Cu w0.4: R3.1 120.169,13.714 IC1.8@121.068,14.614 ; IC1.8@121.068,14.975 IC1.8
Net-(J2-Pin_1): J2.1 R11.2 | length 6.7
  F.Cu w0.8: R11.2 116.4,19.452 J2.1
Net-(U6--INA): R5.1 U6.2 VR1.1 VR1.2 | length 15.2
  F.Cu w0.4: R5.1@125.864,22.203 R5.1 125.889,22.233 VR1.1 VR1.2 134.3,21.54 U6.2 ; VR1.1@131.026,21.933 VR1.1@131.068,21.891 ; VR1.2@133.564,21.934 VR1.2@133.608,21.891
Net-(U7--IN): R8.1 R9.2 R10.1 U7.2 | length 18
  F.Cu w0.4: R8.1 138.717,4.162 142.626,8.071 U7.2 142.626,11.504 143.055,11.933 147.253,11.933 R10.1
Vin1: IC1.2 R1.2 U1.1 | length 26.3
  F.Cu w0.4: U1.1@112,12.189 112,4.489 114.2,2.289 120.8,2.289 122.138,3.627 R1.2 122.338,7.527 IC1.2 ; R1.2@122.151,7.395 R1.2@122.326,7.57
Vin2: IC1.3 R2.1 U2.1 | length 41.5
  F.Cu w0.4: R2.1@123.596,7.475 R2.1@123.676,7.395 ; IC1.3 123.608,7.382 R2.1 123.663,3.576 125.05,2.189 145.5,2.189 151,7.689 U2.1@151,12.139
pads on no net: J2.3 J3.MP J4.3 U7.1 U7.5 U7.8
copper on no net: | length 598.8
  F.SilkS w0.254: 151,0.789 ccw(c151,14.164) 150.95,27.539 111.95,27.539 ccw(c111.95,14.164) 112,0.789 151.05,0.789 ; 114.1,14.139 ccw(c112,14.139) 114.1,14.139 ; 153.1,14.089 ccw(c151,14.089) 153.1,14.089
  B.SilkS w0.254: 111.95,27.539 ccw(c111.95,14.164) 112,0.789 ; 111.95,27.539 ccw(c111.95,14.164) 112,0.789 ; 111.95,27.539 150.95,27.539 cw(c151,14.164) 151,0.789 151.05,0.789 112,0.789
  Edge.Cuts w0.254: 112,27.739 ccw(c112.025,14.164) 112.05,0.589 ; 112,27.739 ccw(c112.025,14.164) 112.05,0.589 ; 112,27.739 151,27.739 cw(c151.025,14.164) 151.05,0.589 112.05,0.589

## Polygon pours and split planes (outlines as drawn)
-5.5V on B.Cu "B.Cu-/-5.5V" (solid, remove dead copper, pour order 0): 98.175,0.451 165.15,0.365 165.15,27.941 98.175,28.026
GND on In1.Cu "In1.Cu-GND" (solid, remove dead copper, pour order 1): 97.8,0.207 165.1,0.12 165.1,28.073 97.8,28.159
+5.5V on In2.Cu "In2.Cu-/+5.5V" (solid, remove dead copper, pour order 2): 97.8,0.086 165.025,0 165.025,28.076 97.8,28.162

## Other copper
F.Cu:
  region: 118.1,15.464 116.9,14.364 115.9,14.364 114.8,15.464 114.8,16.464 118.1,16.464
F.SilkS:
  text "*" at 107.3,26.222 h1
  text "* * * * * * * * * * * * * * * * * * * * * * * * *" at 111.35,25.947 h1
  text "*" at 149.375,25.922 h1
  text "*" at 106.3,25.697 h1
  text "*" at 105.3,25.072 h1
  text "*" at 154.925,25.072 h1
  text "*" at 155.85,24.622 h1
  text "*" at 104.45,24.422 h1
  text "*" at 156.675,24.172 h1
  text "*" at 157.5,23.672 h1
  text "*" at 103.5,23.497 h1
  text "*" at 158.25,22.872 h1
  text "*" at 102.55,22.472 h1
  text "*" at 159.1,22.222 h1
  text "*" at 159.8,21.472 h1
  text "*" at 101.725,21.322 h1
  text "*" at 160.5,20.622 h1
  text "*" at 101.225,20.147 h1
  text "*" at 161.1,19.772 h1
  text "*" at 161.625,18.922 h1
  text "*" at 100.825,18.897 h1
  text "*" at 162.15,17.922 h1
  text "*" at 100.45,17.422 h1
  text "*" at 162.55,16.897 h1
  text "*" at 100.25,16.072 h1
  text "*" at 162.75,15.722 h1
  text "*" at 100.1,14.872 h1
  text "*" at 163,14.622 h1
  text "*" at 100.15,13.747 h1
  text "*" at 163.15,13.672 h1
  text "*" at 100.4,12.647 h1
  text "*" at 163.075,12.497 h1
  text "*" at 100.6,11.522 h1
  text "*" at 163.05,11.322 h1
  text "*" at 101.025,10.497 h1
  text "*" at 162.85,10.172 h1
  text "*" at 101.475,9.472 h1
  text "*" at 162.5,9.022 h1
  text "*" at 101.9,8.622 h1
  text "*" at 162,7.772 h1
  text "*" at 102.375,7.747 h1
  text "*" at 103,7.072 h1
  text "*" at 161.4,6.672 h1
  text "*" at 103.725,6.322 h1
  text "*" at 160.65,5.722 h1
  text "*" at 104.475,5.697 h1
  text "*" at 105.15,5.122 h1
  text "*" at 159.95,4.922 h1
  text "*" at 105.975,4.522 h1
  text "*" at 159.15,4.122 h1
  text "*" at 106.85,4.047 h1
  text "*" at 107.65,3.522 h1
  text "*" at 158.3,3.372 h1
  text "*" at 108.65,3.097 h1
  text "*" at 109.775,2.772 h1
  text "*" at 157.35,2.722 h1
  text "*" at 110.825,2.497 h1
  text "*" at 111.85,2.247 h1
  text "*" at 156.3,2.122 h1
  text "*" at 155.2,1.622 h1
  text "*" at 154.15,1.222 h1
  text "*" at 153.125,0.797 h1
  text "*" at 151.925,0.497 h1
  text "* * * * * * * * * * * * * * * * * * * * * * * * *" at 112.2,0.347 h1
  text "*" at 150.4,0.272 h1
B.SilkS:
  text "SensaLimb sEMG" at 141.25,4.185 h1.5
  text "v0.4" at 134.85,1.886 h1.5